# Altium PCB E17-07-TIU.PcbDoc
Units mm, origin at the board's own origin, x right, y up, seen from the top; angles counter-clockwise.
Board outline 11 x 49 mm, 2 copper layers (Top Layer, Bottom Layer); 11 components, 7 nets, 28 pads, 0 vias.
Unrouted connection lines stored in the file: 2.
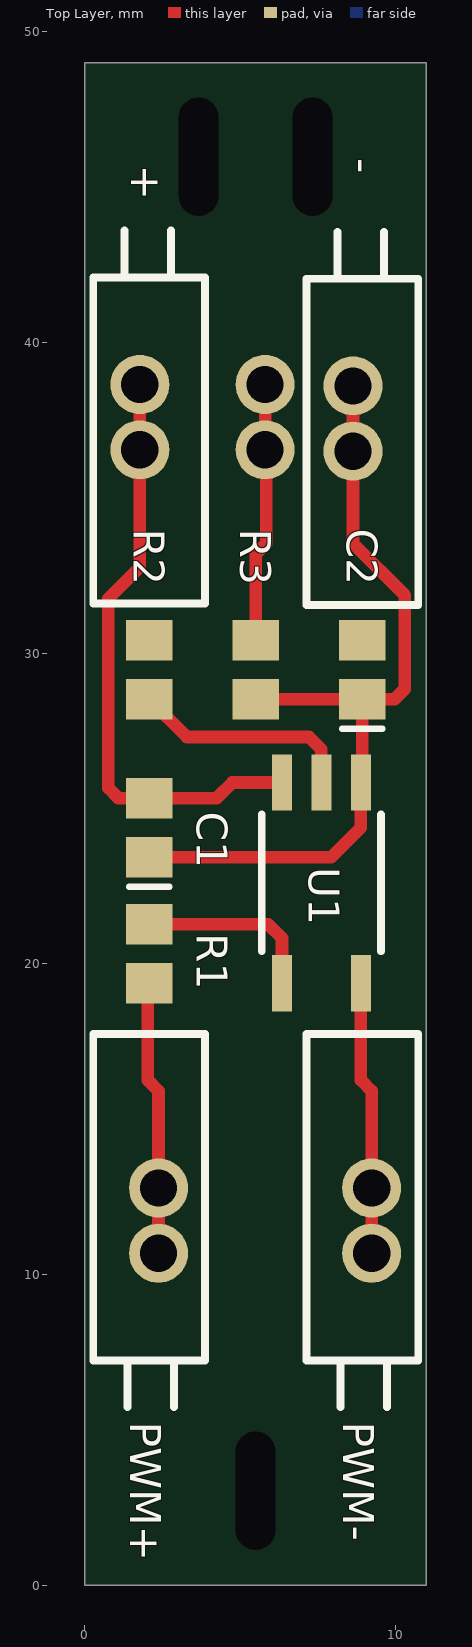
[diagram p0: Top Layer view]
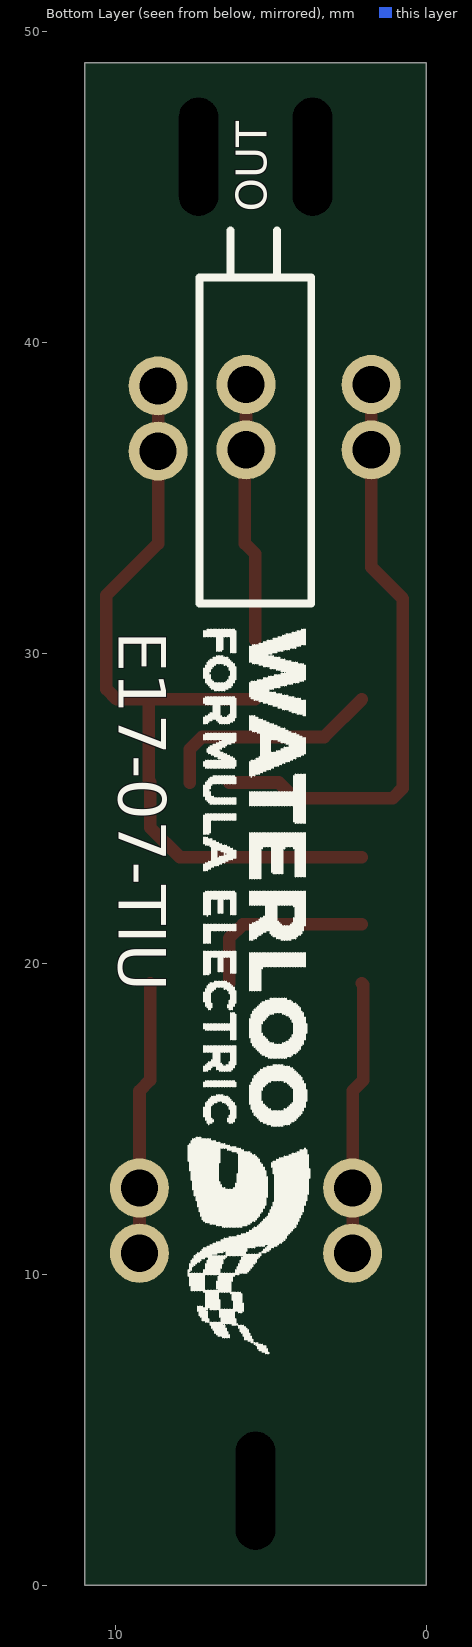
[diagram p1: Bottom Layer view, seen from below]

## Layer stack, top to bottom
Top Solder: solder mask 0.0102, Solder Resist, Dk 3.5
Top Layer: signal copper 0.0356
Dielectric 1: dielectric 0.32, FR-4, Dk 4.8
Bottom Layer: signal copper 0.0356
Bottom Solder: solder mask 0.0102, Solder Resist, Dk 3.5

## Board outline
0,0 0,49 11,49 11,0

## Design rules (kind name [scope] priority, off if disabled: settings)
Clearance [All] p1: gap=0.254 ignorepadtopadclearanceinfootprint=FALSE except(0: Arc-Hole Track-Hole SMDPad-Hole THPad-Hole Via-Hole Fill-Hole Poly-Hole Region-Hole Text-Hole)
PolygonConnect [All] p1: connectstyle=Relief reliefconductorwidth=0.254 reliefentries=4 polygonreliefangle="90 Angle" airgapwidth=0.254
RoutingVias [All] p1: holewidth=0.711 width=1.27 viastyle="Through Hole" minholewidth=0.711 minwidth=1.27 maxholewidth=0.711 maxwidth=1.27
SolderMaskExpansion [All] p1: expansion=0.102
Width [All] p1: maxlimit=0.508 minlimit=0.254 preferedwidth=0.381
30 further rules are at their usual default settings.

## Components (designator, comment, footprint, x,y, rotation, side; value= is the part's Value field where it differs from the comment)
+ "1722490200" 1722490200 1.778,37.592 r90 top (schematic designator J1)
- "1722490200" 1722490200 8.636,37.547 r90 top (schematic designator J5)
C1 "Cap" C0805 2.078,24.384 r90 top
C2 "Cap" C0805 8.936,29.464 r90 top
OUT "1722490200" 1722490200 5.807,37.592 r90 bottom (schematic designator J2)
PWM+ "1722490200" 1722490200 2.378,11.737 r270 top (schematic designator J3)
PWM- "1722490200" 1722490200 9.236,11.737 r270 top (schematic designator J4)
R1 "Res" 2012[0805] 2.078,20.32 r90 top
R2 "Res" 2012[0805] 2.078,29.464 r90 top
R3 "Res" 2012[0805] 5.507,29.464 r90 top
U1 "ACPL-M21L" ACPL-M21L 7.62,22.606 r0 top

## Footprints (in the part's own frame and the unit in brackets; to place one, negate y for a bottom-side part, rotate by r counter-clockwise, add the part's x,y. Pads: shape width x height; smd on the part's side, far side on the other; paste and mask are expansions set on the pad)
2012[0805] [mm] "Chip Resistor; Body 2.0 x 1.3 mm (LxW typ)"
  rect 1.3x1.5 smd: 1(-0.95,0) 2(0.95,0)
  body extent -0.97,-0.61 1.03,0.64, height 0.77
1722490200 [mm]
  round 1.9 hole 1.2: 1(-1.05,0) 1(1.05,0)
  Top Layer pour cut-out: -6,1.5 4.5,1.5 4.5,-2 -6,-2
  silkscreen extent -6,-2.1 6,1.5
ACPL-M21L [mm]
  rect 0.635x1.803 smd: 1(-1.27,-3.23) 3(1.27,-3.23) 4(1.27,3.23) 5(0,3.23) 6(-1.27,3.23)
  silkscreen extent -1.92,-2.2 1.92,2.2
C0805 [mm] "Chip Capacitor; Body 2.0 x 1.2 mm (LxW typ)"
  rect 1.3x1.5 smd: 1(-0.95,0) 2(0.95,0)
  silkscreen extent -1.9,-0.65 -1.9,0.65

## Part data
C1 C2: "Capacitor"
R1 R2 R3: "Surface Mount Resistor"

## Free pads (board coordinates)
  round 0 hole 1.27 slot 3.81 at 90 deg unplated: 8(3.667,45.974) 8(5.5,3.048) 8(7.333,45.974)

## Nets (pads, with @x,y where several pads share a name; then routed paths per layer and width w, separated by ;. In a path a pad name is that pad's centre, name@x,y a point inside that pad or via, vN(x,y) a via of type N, cw(c..) or ccw(c..) an arc to the next point about the centre after c; other vN are vias at no path point)
NetC1_1: -.1 C1.1 C2.1 R3.1 U1.4 | length 26.7
  Top Layer w0.406: C1.1 7.94,23.434 8.89,24.384 U1.4 8.936,25.882 C2.1 ; R3.1 C2.1 ; -.1@8.636,38.597 8.636,36.497 8.636,33.528 10.3,31.864 10.3,28.842 9.972,28.514 C2.1
NetC1_2: +.1 C1.2 U1.6 | length 19.3
  Top Layer w0.406: +.1@1.778,38.642 1.778,36.542 1.778,32.766 0.762,31.75 0.762,25.654 1.082,25.334 C1.2 4.252,25.334 4.754,25.836 U1.6
NetC2_2: C2.2 OUT.1 R2.2 R3.2 | length 8.4
  Top Layer w0.406: R3.2 5.507,33.193 5.842,33.528 5.842,36.507 5.807,36.542 OUT.1@5.807,38.642
NetJ3_1: PWM+.1 R1.1 | length 8.8
  Top Layer w0.406: R1.1 2.032,19.324 2.032,16.256 2.378,15.91 2.378,12.787 PWM+.1@2.378,10.687
NetJ4_1: PWM-.1 U1.3 | length 8.8
  Top Layer w0.406: U1.3 8.89,16.256 9.236,15.91 9.236,12.787 PWM-.1@9.236,10.687
NetR1_2: R1.2 U1.1 | length 5.9
  Top Layer w0.406: R1.2 5.908,21.27 6.35,20.828 U1.1
NetR2_1: R2.1 U1.5 | length 7.3
  Top Layer w0.406: R2.1 3.292,27.3 7.219,27.3 7.62,26.899 U1.5

## Silkscreen, mask and mechanical layers (free items; w line width, h text height)
Bottom Overlay:
  drawing of 1116 lines, arcs and shapes, not listed
  text "E17-07-TIU" at 9.9,30.7 h1.52 r90
Mechanical 1:
  the board outline again, w0.254